# EAGLE board PortableAlarmSystem (EAGLE 8.0.1)
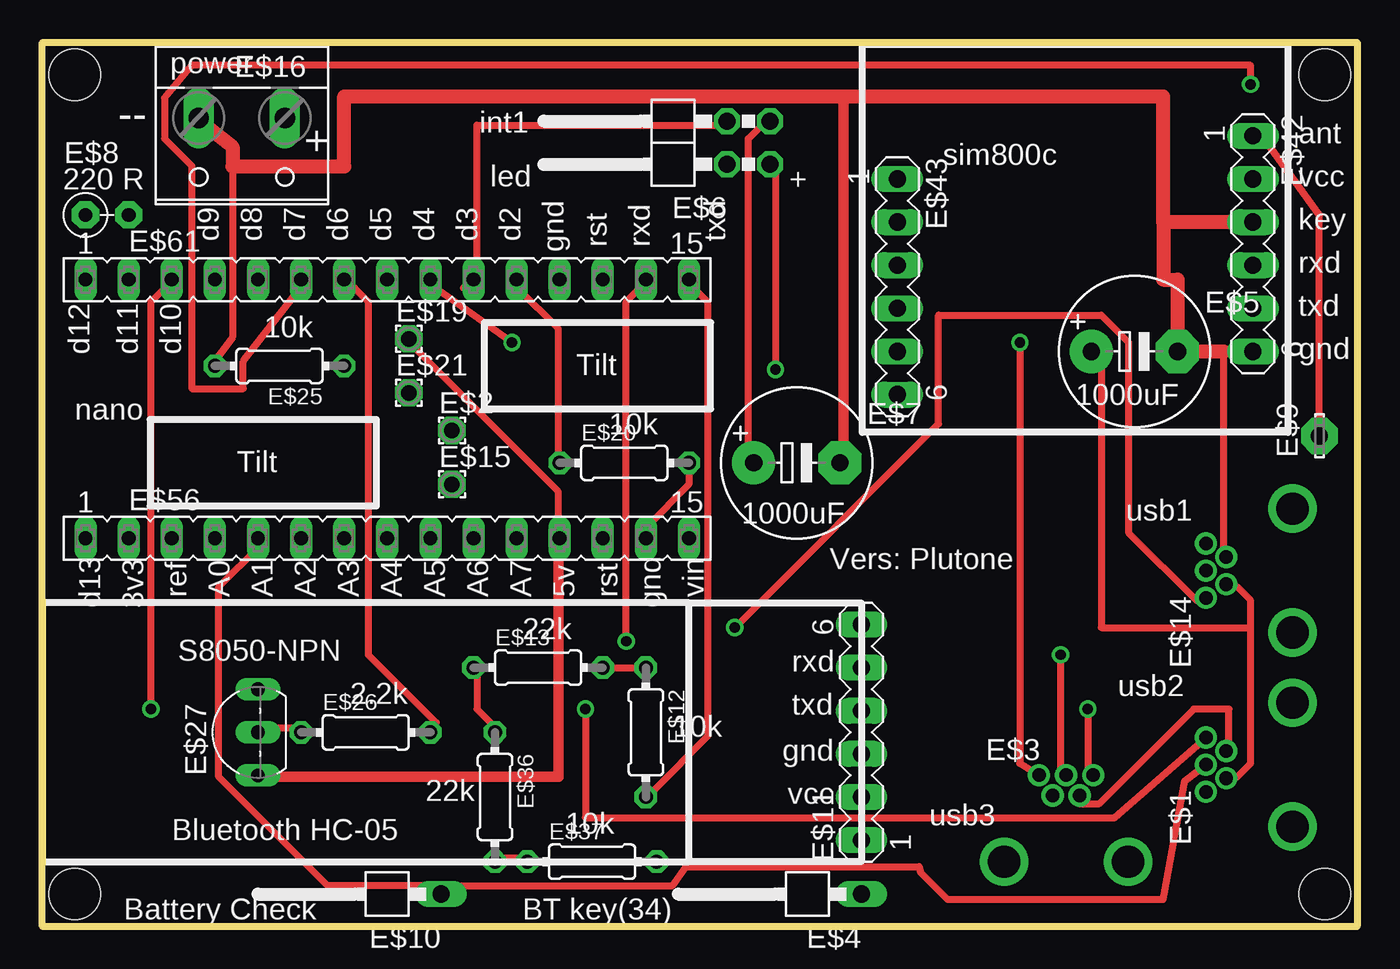
[diagram p0: board, top side]
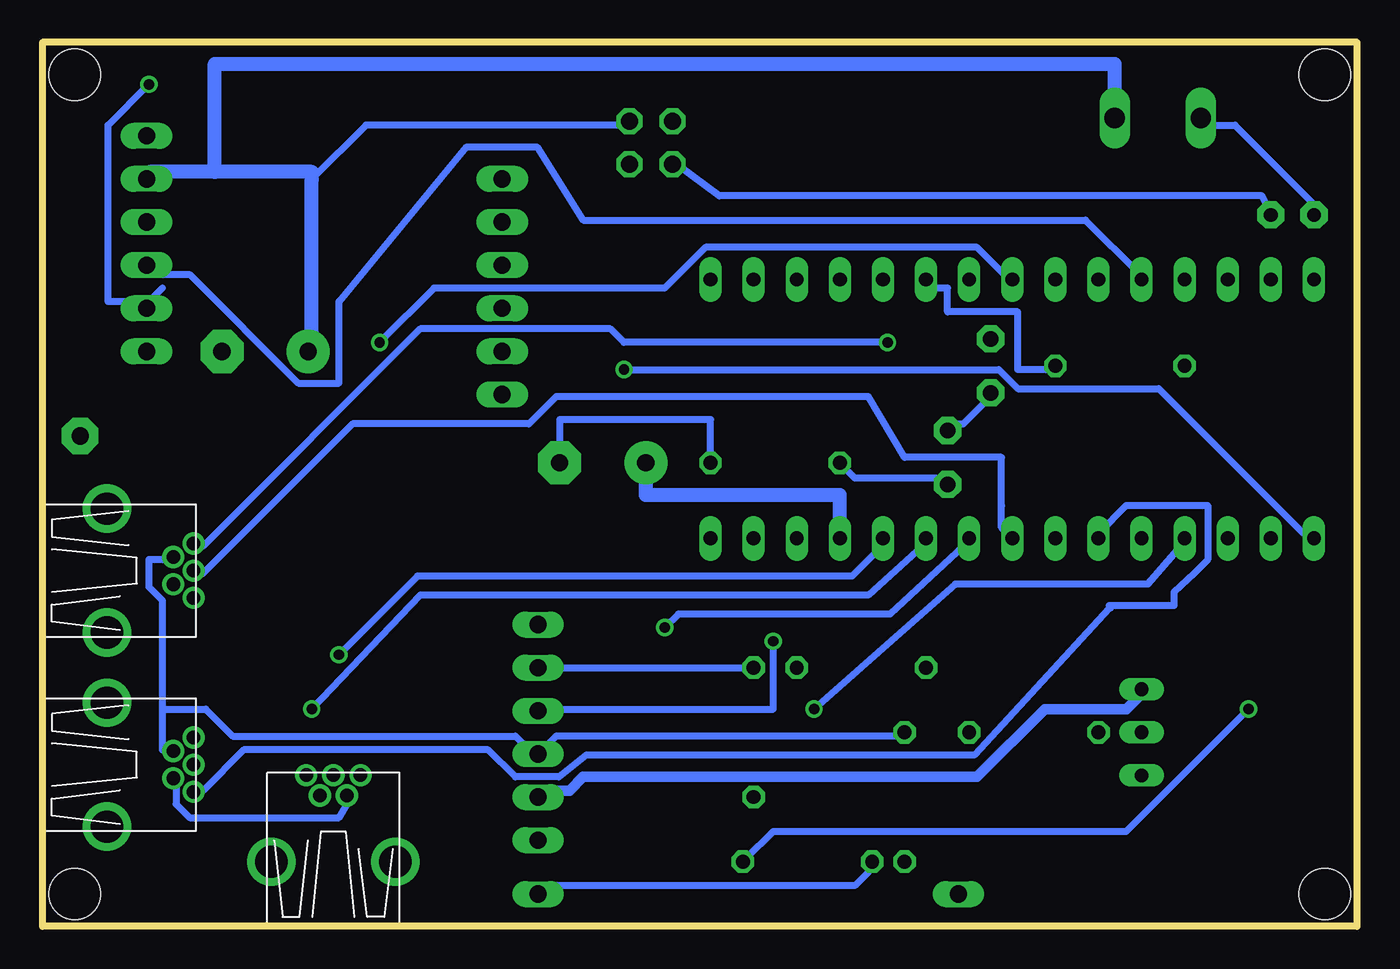
[diagram p1: board, bottom side, seen from below]

Size 77.47 x 52.07 mm. Coordinates in mm from the lower left corner, seen from the top.
Outline: 0,0 0,52.07 77.47,52.07 77.47,0 0,0
Copper layers (1*16): Top 0.035mm / dielectric 1.5mm / Bottom 0.035mm
Design rules "default": minimum track width 10mil, minimum drill 24mil, track to track 8mil, track to pad 8mil, pad to pad 8mil, via to via 8mil, smd to smd 8mil, copper to edge 40mil, drill to drill 8mil, minimum pad ring 10mil, minimum via ring 8mil, stop-mask expansion 4mil, vias tented up to drill 0mil, thermal gap 10mil
Holes 3 mm at 1.91,50.16 75.56,50.16 1.91,1.91 75.56,1.91

## Footprints (pad centres in the part's own frame; a part is rotated, then mirrored left to right if it is on the bottom)
USB-MB-H = drill 0.8: D+ 5.1,0; D- 3.9,0.8; GND 5.1,-1.6; ID 3.9,-0.8; VBUS 5.1,1.6 | drill 1.9: P$6 0,-3.65; P$7 0,3.65
1,6/0,9 = drill 0.914 pad 1.6 octagon: 1 0,0
1X01/90 = drill 1.016 long: 1 -1.27,-3.81
E5-8,5 = drill 1.016 pad 2.54: + -2.54,0 | drill 1.016 pad 2.54 octagon: - 2.54,0
2X02/90 = drill 1.016 octagon: 1 -1.27,-6.35; 2 -1.27,-3.81; 3 1.27,-6.35; 4 1.27,-3.81
RS-2,5 = drill 0.813 pad 1.6 octagon: 1 -1.27,0; 2 1.27,0
LSP10 = drill 1.016 pad 2.159 octagon: MP 0,0
MA06-1 = drill 1.016 long: 1 -6.35,0; 2 -3.81,0; 3 -1.27,0; 4 1.27,0; 5 3.81,0; 6 6.35,0
0204/7 = drill 0.813 octagon: 1 -3.81,0; 2 3.81,0
W237-132 = drill 1.194 long: 1 -2.54,-0.635; 2 2.54,-0.635
TO92- = drill 0.813 long: 1 2.54,0; 2 0,0; 3 -2.54,0
FE15 = drill 0.813 long: 1 -17.78,0; 2 -15.24,0; 3 -12.7,0; 4 -10.16,0; 5 -7.62,0; 6 -5.08,0; 7 -2.54,0; 8 0,0; 9 2.54,0; 10 5.08,0; 11 7.62,0; 12 10.16,0; 13 12.7,0; 14 15.24,0; 15 17.78,0

## Placement (x,y rotation side)
E$1  [USB-MB-H]  73.66,9.53 180 top
E$2  [1,6/0,9]  24.13,29.21 0 top
E$3  [USB-MB-H]  60.33,3.81 90 top
E$4  [1X01/90]  44.45,3.17 90 top
E$5  [E5-8,5]  64.35,33.87 0 top
E$6  [2X02/90]  36.53,46.16 90 top
E$7  [E5-8,5]  44.45,27.3 0 top
E$8  [RS-2,5]  3.81,41.91 0 top
E$9  [LSP10]  75.25,28.89 90 top
E$10  [1X01/90]  19.68,3.17 90 top
E$11  [MA06-1]  48.26,11.43 90 top
E$12  [0204/7]  35.56,11.43 270 top
E$13  [0204/7]  29.21,15.24 0 top
E$14  [USB-MB-H]  73.66,20.95 180 top
E$15  [1,6/0,9]  24.13,26.04 0 top
E$16  [W237-132]  11.75,46.99 180 top
E$19  [1,6/0,9]  21.59,34.61 0 top
E$20  [0204/7]  34.29,27.3 0 top
E$21  [1,6/0,9]  21.59,31.43 0 top
E$25  [0204/7]  13.97,33.02 180 top
E$26  [0204/7]  19.05,11.43 0 top
E$27  [TO92-]  12.7,11.43 90 top
E$36  [0204/7]  26.67,7.62 270 top
E$37  [0204/7]  32.38,3.81 0 top
E$42  [MA06-1]  71.33,40.22 270 top
E$43  [MA06-1]  50.38,37.68 270 top
E$56  [FE15]  20.32,22.86 0 top
E$61  [FE15]  20.32,38.1 0 top

## Library data of the parts
E$1 E$3 E$14 = con-usb-3
E$2 E$15 E$19 E$21 = wirepad
E$4 E$6 E$10 = pinhead
E$5 E$7 = ref-packages-longpad
E$8 = discrete
E$9 = solpad
E$11 E$42 E$43 = con-lstb
E$12 E$13 E$20 E$25 E$26 E$36 E$37 = eagle-ltspice
E$16 = con-wago-508
E$27 = transistor-fet
E$56 E$61 = con-lsta

## Nets
S$2: E$11.2 E$27.1
S$3: E$11.4 E$61.14
S$4: E$1.D- E$3.D- E$5.+ E$6.3 E$7.+ E$14.D- E$16.1 E$19.1 E$27.3 E$42.2 E$56.12
S$5: E$37.2 E$61.3
S$7: E$6.2 E$8.2
S$8: E$6.4 E$25.1 E$61.10
S$9: E$9.MP E$42.1
S$10: E$26.1 E$27.2
S$11: E$12.2 E$61.15
S$12: E$42.5 E$61.6
S$13: E$42.4 E$61.5
S$15: E$61.1
S$16: E$61.2
S$17: E$3.VBUS E$61.8
S$18: E$14.GND E$61.9
S$19: E$61.12
S$20: E$26.2 E$61.7
S$21: E$61.13
S$22: E$6.1 E$56.1
S$23: E$56.2
S$24: E$56.3
S$25: E$1.GND E$56.4
S$26: E$1.ID E$3.ID E$5.- E$7.- E$8.1 E$11.3 E$13.1 E$14.ID E$16.2 E$20.2 E$25.2 E$36.1 E$42.3 E$42.6 E$56.14
S$27: E$1.D+ E$10.1 E$56.5
S$28: E$1.VBUS E$56.6
S$29: E$56.7
S$30: E$14.D+ E$56.8
S$31: E$4.1 E$36.2 E$37.1
S$32: E$14.VBUS E$56.9
S$33: E$3.GND E$56.10
S$34: E$11.5 E$12.1 E$13.2
S$35: E$15.1 E$20.1 E$61.11
S$36: E$3.D+ E$56.11
S$37: E$56.13
S$38: E$56.15
S$39: E$2.1 E$21.1

## Tracks (layer width: path | path; a pad name or v marks a point on that pad's centre or on a via)
S$2
  Bottom 0.406: 12.8,13.6 E$27.1
  Bottom 0.61: 12.8,13.6 13.6,12.8 18.4,12.8 22.4,8.8 45.6,8.8 46.4,8 48,8 E$11.2
S$3  (via drill 0.61)
  Top 0.406: v34.4,16.8 34.4,36.8 35.2,37.6 E$61.14
  Bottom 0.406: v34.4,16.8 34.4,12.8 48,12.8 E$11.4
S$4
  Top 0.406: 71.2,17.6 71.2,9.6 70.4,8.8 E$1.D- | 71.2,17.6 71.2,19.2 70.4,20 E$14.D- | 71.2,17.6 62.4,17.6 62.4,33.6 E$5.+ | 12.8,8.8 E$27.3 | 30.4,22.4 E$56.12 30.4,23.2 30.4,25.6 21.6,34.4 E$19.1 | E$6.3 42.4,47.2 41.6,46.4 41.6,28 E$7.+
  Top 0.61: 12.8,8.8 30.4,8.8 30.4,22.4
  Bottom 0.406: E$42.2 arc60 71.12,44.45 | E$5.+ 61.81,34.71 61.59,34.92 | 61.59,44.45 61.59,44 61.6,44 58.4,47.2 43.2,47.2 E$6.3 | E$3.D- 59.52,7.2 60,6.4 68.8,6.4 69.6,7.2 69.6,8.8 E$1.D-
  Bottom 0.813: 67.31,44.45 71.12,44.45 | 67.31,44.45 67.31,50.8 14.29,50.8 E$16.1 | 61.59,34.92 61.59,44 | 61.59,44.45 67.31,44.45 | E$56.12 30.48,25.4 41.91,25.4 E$7.+
S$5  (via drill 0.61)
  Top 0.406: v6.4,12.8 6.4,36.8 7.2,37.6 E$61.3
  Bottom 0.406: v6.4,12.8 13.6,5.6 34.4,5.6 36,4 E$37.2
S$7
  Bottom 0.406: E$6.2 40,44.8 37.6,43.03 5.6,43.03 E$8.2
S$8
  Top 0.406: 24.8,37.6 E$61.10 25.6,38.4 25.6,47.2 40,47.2 E$6.4
  Bottom 0.406: E$25.1 18.4,32.8 20,32.8 20,33.66 20,36.2 24.13,36.2 24.13,37.6 24.8,37.6 E$61.10
S$9
  Top 0.406: E$9.MP 75.25,41.91 72,46.4 E$42.1
S$10
  Top 0.406: E$27.2 12.8,11.68 15.2,11.68 E$26.1
S$11
  Top 0.406: E$12.2 36,8 39.2,11.2 39.2,36.8 38.4,37.6 E$61.15
S$12  (via drill 0.61)
  Top 0.406: v71.2,49.6 71.2,50.72 8.8,50.72 7.2,48.8 7.2,46.4 8.8,44.8 8.8,31.68 11.84,31.68 11.84,33.28 15.2,37.6 E$61.6
  Bottom 0.406: 70.4,37.6 71.2,36.8 E$42.5 72,36.8 73.6,36.8 73.6,47.2 v71.2,49.6
S$13
  Bottom 0.406: E$61.5 12.8,38.4 16,41.6 45.6,41.6 48.33,45.92 52.47,45.92 60,36.8 60,32 62.4,32 68.8,38.4 71.2,38.4 E$42.4
S$17  (via drill 0.61)
  Top 0.406: v57.6,34.4 57.6,9.6 58.4,9.12 E$3.VBUS
  Bottom 0.406: v57.6,34.4 54.4,37.6 40.8,37.6 38.4,40 22.4,40 20.8,38.4 E$61.8
S$18  (via drill 0.61)
  Top 0.406: v27.67,34.4 23.2,37.6 E$61.9
  Bottom 0.406: v27.67,34.4 43.2,34.4 44,35.2 55.2,35.2 68,22.4 E$14.GND
S$20
  Top 0.406: E$26.2 23.2,12 19.2,16 19.2,36.8 18.4,37.6 E$61.7
S$22  (via drill 0.61)
  Top 0.406: v43.2,32.8 43.2,44.8 E$6.1
  Bottom 0.406: v43.2,32.8 21.12,32.8 20,31.68 11.68,31.68 3.2,23.2 E$56.1
S$25  (via drill 0.61)
  Top 0.406: v32,12.8 32,6.4 63.2,6.4 68.32,10.88 E$1.GND
  Bottom 0.406: v32,12.8 23.68,20.16 12.32,20.16 10.4,22.4 E$56.4
S$26
  Top 0.406: E$20.2 38.1,26.04 35.56,23.5 E$56.14 | E$36.1 26.4,12 25.6,12.8 25.6,15.2 E$13.1 | E$3.ID 61.12,7.2 62.25,7.2 67.85,12.8 69.92,12.8 69.92,10.4 E$1.ID | 69.6,33.87 69.6,22.4 E$14.ID | 11.2,44.77 11.2,34.72 10.4,33.6 E$25.2 | 47.2,28 E$7.- | 9.6,47.2 E$16.2
  Top 0.61: 69.6,33.87 E$42.6 | 47.2,48.9 47.2,28
  Top 0.813: 66.04,41.49 66.04,48.9 47.2,48.9 17.78,48.9 17.78,44.77 11.2,44.77 11.2,45.92 9.6,47.2 | 66.04,41.49 66.04,38.1 66.89,38.1 E$5.- 69.6,33.87 | E$42.3 66.04,41.49
  Bottom 0.406: E$20.2 38.1,29.84 46.99,29.84 E$7.- | E$36.1 27.2,11.2 47.2,11.2 48,10.4 E$11.3 48.8,10.4 49.6,11.2 66.25,11.2 67.85,12.8 70.4,12.8 | 70.4,12.8 70.4,19.2 71.2,20 71.2,21.6 70.4,21.6 E$14.ID | 70.4,12.8 70.4,10.4 E$1.ID | E$8.1 2.4,42.4 7.2,47.2 8.8,47.2 E$16.2
S$27
  Top 0.406: E$1.D+ 67.31,8.57 66.04,1.59 53.34,1.59 51.75,3.17 51.66,3.52 37.92,3.52 37.12,2.4 24,2.4 E$10.1 23.2,2.4 16.8,2.4 10.4,8.8 10.4,20 12.8,22.4 E$56.5
S$28
  Bottom 0.406: E$1.VBUS 68,8 65.6,10.4 51.2,10.4 49.6,8.8 47.03,8.8 45.44,10.08 22.55,10.08 14.61,18.73 arc-180 14.61,18.89 10.79,18.89 10.79,19.68 9.6,20.8 8.8,21.6 8.8,24.8 13.6,24.8 15.2,23.2 E$56.6
S$30
  Bottom 0.406: E$14.D+ 68,20.8 59.2,29.6 48.8,29.6 47.2,31.2 28.8,31.2 26.67,27.62 20.95,27.62 20.95,24.8 arc-205 20.95,24.77 20.95,23.5 E$56.8
S$31
  Top 0.406: E$36.2 27.2,4 28,4 E$37.1
  Bottom 0.406: E$4.1 48,2.4 29.6,2.4 28.8,3.2 E$37.1
S$32  (via drill 0.61)
  Top 0.406: v40.8,17.6 52.8,29.6 52.8,36 62.4,36 64,34.4 64,23.2 68,19.2 E$14.VBUS
  Bottom 0.406: v40.8,17.6 40,18.4 27.52,18.4 23.2,22.4 E$56.9
S$33  (via drill 0.61)
  Top 0.406: v61.6,12.8 61.6,8.8 E$3.GND
  Bottom 0.406: v61.6,12.8 55.2,19.52 28.8,19.52 25.6,22.4 E$56.10
S$34
  Top 0.406: E$13.2 33.6,15.2 35.2,15.2 E$12.1
  Bottom 0.406: E$11.5 48,15.2 36,15.2 E$12.1
S$35
  Top 0.406: E$61.11 28,37.6 30.4,35.2 30.4,27.2 E$20.1
  Bottom 0.406: E$20.1 30.4,27.2 29.6,26.4 24.8,26.4 E$15.1
S$36  (via drill 0.61)
  Top 0.406: v60,16 60,8.8 E$3.D+
  Bottom 0.406: v60,16 55.37,20.64 29.77,20.64 28,22.4 E$56.11
S$39
  Bottom 0.406: E$21.1 21.6,31.2 23.2,29.6 24,29.6 E$2.1

## Text on the board
tPlace: power | -- | + | int1 | ant | 220 R | + | sim800c | led | vcc | key | d9 | d8 | d7 | d6 | d5 | d4 | d3 | d2 | gnd | rst | rxd | txd | rxd | txd | 10k | d12 | d11 | d10 | gnd | Tilt | 1000uF | nano | 10k | Tilt | 1000uF | usb1 | Vers: Plutone | d13 | 3v3 | ref | A0 | A1 | A2 | A3 | A4 | A5 | A6 | A7 | 5v | rst | gnd | vin | 22k | S8050-NPN | rxd | usb2 | 2.2k | txd | 10k | gnd | vcc | 22k | usb3 | Bluetooth HC-05 | 10k | Battery Check | BT key(34)